# EAGLE board schematic (EAGLE 5.11)
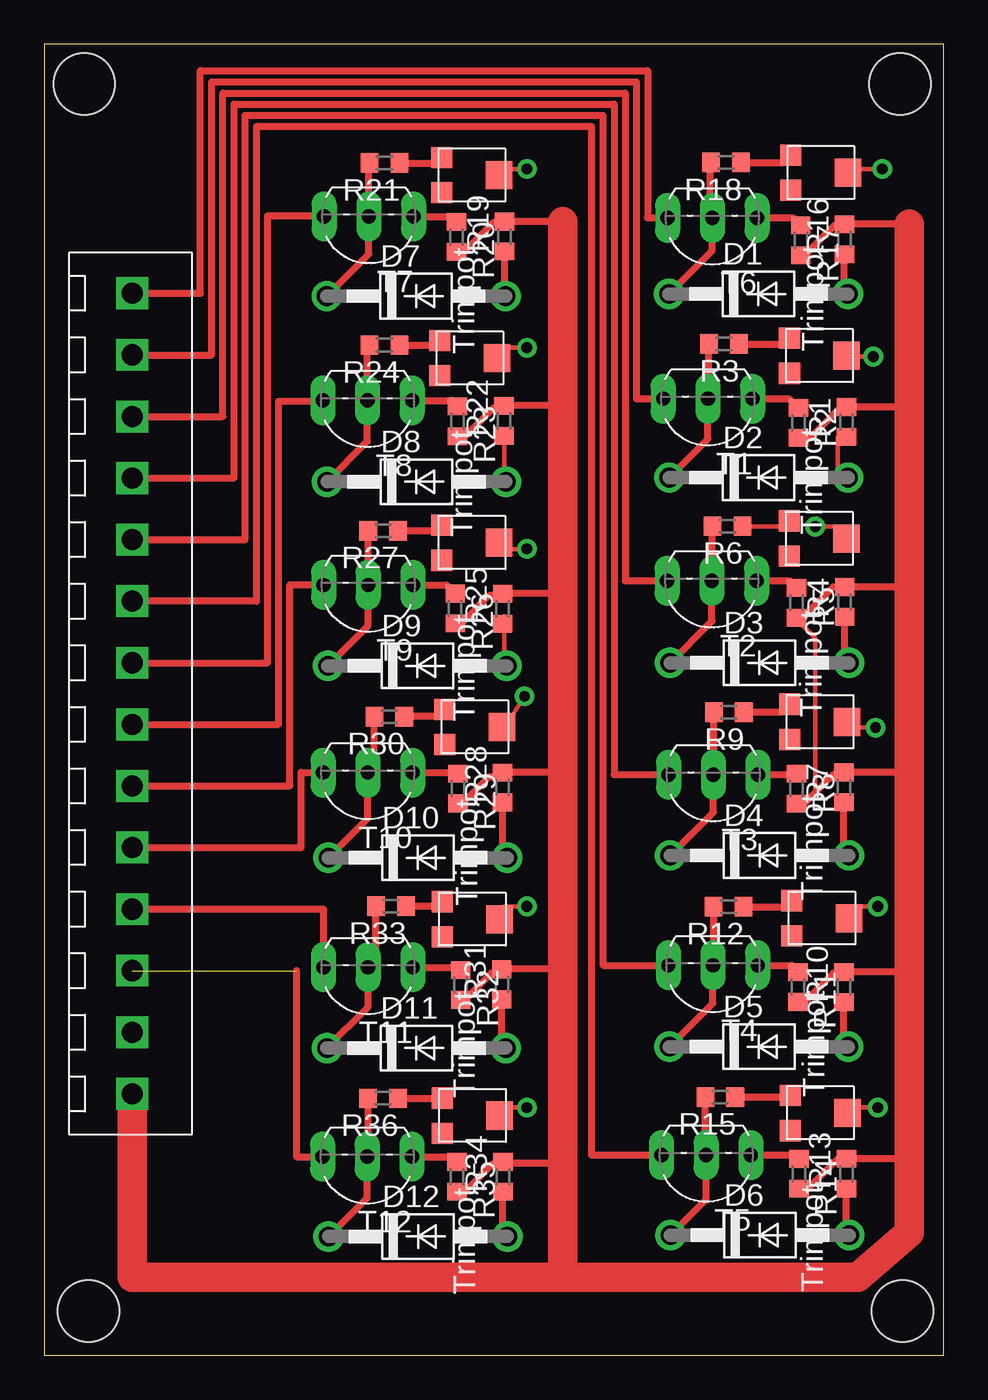
[diagram p0: board, top side]
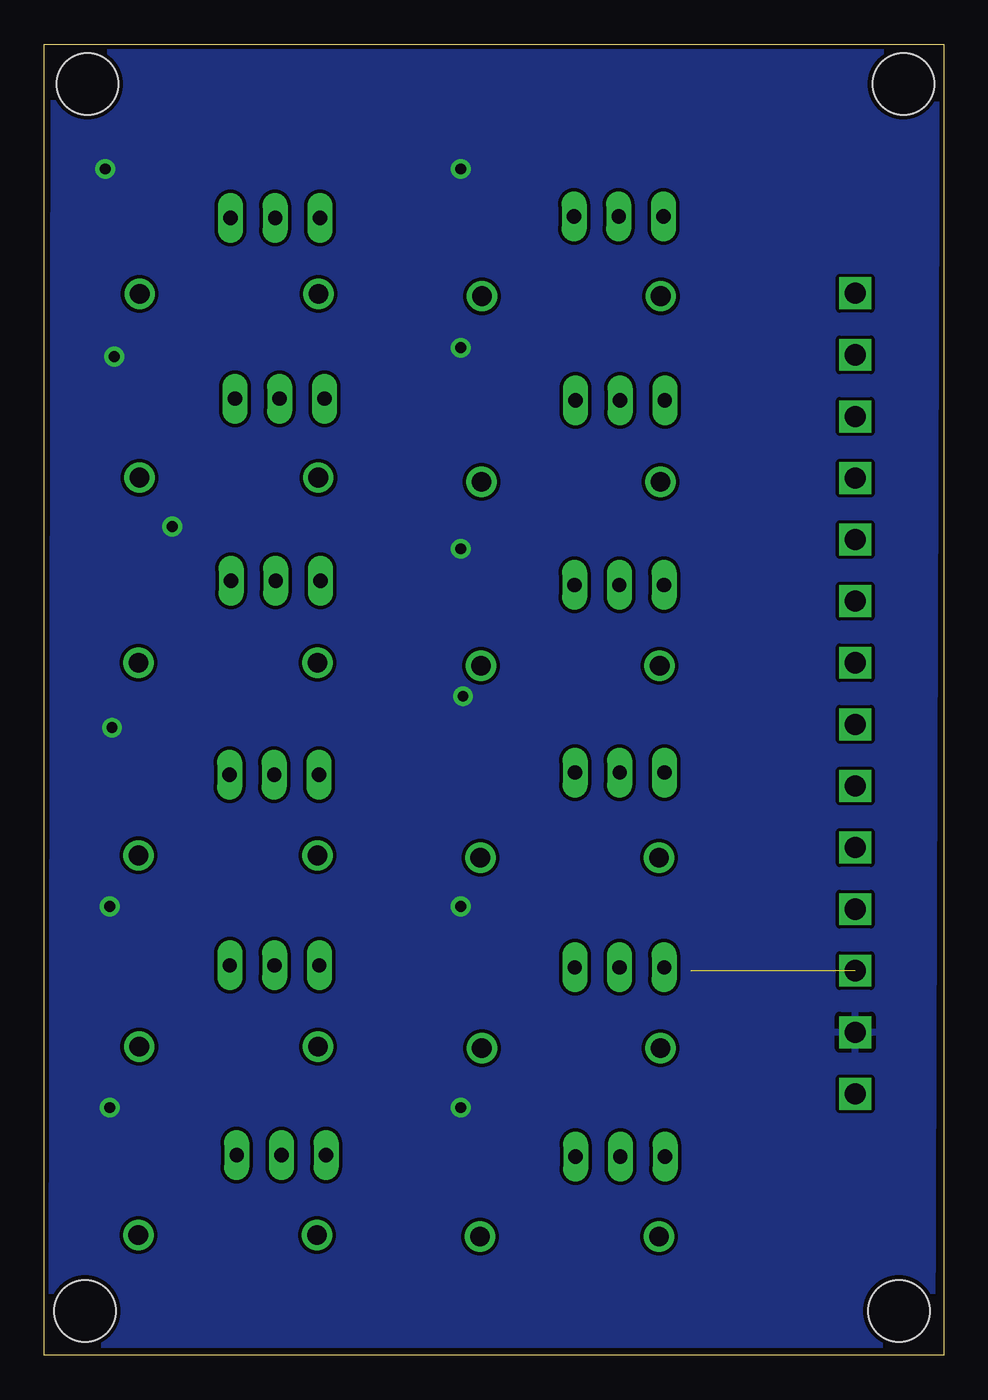
[diagram p1: board, bottom side, seen from below]

Size 51.1 x 74.54 mm. Coordinates in mm from the lower left corner, seen from the top.
Outline: 0,0 51.1,0 51.1,74.54 0,74.54 0,0
Copper layers (1*16): Top 0.035mm / dielectric 1.5mm / Bottom 0.035mm
Design rules "SparkFun": minimum track width 8mil, minimum drill 20mil, track to track 8mil, track to pad 8mil, pad to pad 8mil, via to via 8mil, smd to smd 8mil, copper to edge 10mil, drill to drill 8mil, minimum pad ring 12mil, minimum via ring 10mil, stop-mask expansion 4mil, vias tented up to drill 25mil, thermal gap 10mil
Holes 3.51 mm at 2.29,72.26 48.64,72.26 2.54,2.54 48.77,2.54

## Footprints (pad centres in the part's own frame; a part is rotated, then mirrored left to right if it is on the bottom)
DO41-10 = drill 1.118 round: A 5.08,0; C -5.08,0
R0603 = smd 1 x 1.1: 1 -0.85,0; 2 0.85,0
TO92-EBC = drill 0.813 long: B 0,-1.27; C 2.54,-1.27; E -2.54,-1.27
TC33X-2-102E = smd 1.2 x 1.2: 1 -1,-1.8; 3 1,-1.8 | smd 1.6 x 1.5: 2 0,1.45
OSTTE140161 = drill 1.2 square: 0 -22.75,0; 1 -19.25,0; 2 -15.75,0; 3 -12.25,0; 4 -8.75,0; 5 -5.25,0; 6 -1.75,0; 7 1.75,0; 8 5.25,0; 9 8.75,0; 10 12.25,0; 11 15.75,0; 12 19.25,0; 13 22.75,0

## Placement (x,y rotation side)
D1  1N4004  [DO41-10]  40.59,60.34 0 top
D2  1N4004  [DO41-10]  40.6,49.89 0 top
D3  1N4004  [DO41-10]  40.65,39.37 0 top
D4  1N4004  [DO41-10]  40.65,28.42 0 top
D5  1N4004  [DO41-10]  40.61,17.55 0 top
D6  1N4004  [DO41-10]  40.67,6.84 0 top
D7  1N4004  [DO41-10]  21.14,60.21 0 top
D8  1N4004  [DO41-10]  21.16,49.66 0 top
D9  1N4004  [DO41-10]  21.21,39.2 0 top
D10  1N4004  [DO41-10]  21.24,28.29 0 top
D11  1N4004  [DO41-10]  21.15,17.48 0 top
D12  1N4004  [DO41-10]  21.25,6.76 0 top
R1  [R0603]  45.59,53.05 90 top
R2  [R0603]  42.86,53 270 top
R3  [R0603]  38.63,57.49 180 top
R4  [R0603]  45.49,42.83 90 top
R5  [R0603]  42.75,42.79 270 top
R6  [R0603]  38.83,47.14 180 top
R7  [R0603]  45.44,32.29 90 top
R8  [R0603]  42.76,32.21 270 top
R9  [R0603]  38.91,36.56 180 top
R10  [R0603]  45.45,20.94 90 top
R11  [R0603]  42.83,20.95 270 top
R12  [R0603]  38.89,25.51 180 top
R13  [R0603]  45.59,10.34 90 top
R14  [R0603]  42.89,10.33 270 top
R15  [R0603]  38.42,14.69 180 top
R16  [R0603]  45.48,63.44 90 top
R17  [R0603]  43,63.38 270 top
R18  [R0603]  38.75,67.8 180 top
R19  [R0603]  26.17,63.59 90 top
R20  [R0603]  23.43,63.58 270 top
R21  [R0603]  19.35,67.77 180 top
R22  [R0603]  26.13,53.12 90 top
R23  [R0603]  23.49,53.1 270 top
R24  [R0603]  19.34,57.42 180 top
R25  [R0603]  26.06,42.44 90 top
R26  [R0603]  23.36,42.46 270 top
R27  [R0603]  19.27,46.88 180 top
R28  [R0603]  26.05,32.28 90 top
R29  [R0603]  23.51,32.22 270 top
R30  [R0603]  19.62,36.31 180 top
R31  [R0603]  26.01,21.09 90 top
R32  [R0603]  23.67,21.06 270 top
R33  [R0603]  19.71,25.54 180 top
R34  [R0603]  26.07,10.16 90 top
R35  [R0603]  23.46,10.16 270 top
R36  [R0603]  19.26,14.62 180 top
T1  [TO92-EBC]  37.72,53.11 180 top
T2  [TO92-EBC]  37.94,42.76 180 top
T3  [TO92-EBC]  38.02,31.74 180 top
T4  [TO92-EBC]  38.01,20.9 180 top
T5  [TO92-EBC]  37.62,10.13 180 top
T6  [TO92-EBC]  37.97,63.39 180 top
T7  [TO92-EBC]  18.45,63.46 180 top
T8  [TO92-EBC]  18.38,53.01 180 top
T9  [TO92-EBC]  18.42,42.52 180 top
T10  [TO92-EBC]  18.4,31.86 180 top
T11  [TO92-EBC]  18.41,20.79 180 top
T12  [TO92-EBC]  18.36,10.03 180 top
U$1  TC33X-2-102E  [TC33X-2-102E]  44.23,67.22 270 top
U$2  OSTTE140161  [OSTTE140161]  5.01,37.62 270 top
U$3  TC33X-2-102E  [TC33X-2-102E]  44.15,56.82 270 top
U$4  TC33X-2-102E  [TC33X-2-102E]  44.13,46.44 270 top
U$5  TC33X-2-102E  [TC33X-2-102E]  44.18,36.01 270 top
U$6  TC33X-2-102E  [TC33X-2-102E]  44.29,24.85 270 top
U$7  TC33X-2-102E  [TC33X-2-102E]  44.2,13.79 270 top
U$8  TC33X-2-102E  [TC33X-2-102E]  24.4,67.08 270 top
U$9  TC33X-2-102E  [TC33X-2-102E]  24.28,56.69 270 top
U$10  TC33X-2-102E  [TC33X-2-102E]  24.41,46.2 270 top
U$11  TC33X-2-102E  [TC33X-2-102E]  24.57,35.72 270 top
U$12  TC33X-2-102E  [TC33X-2-102E]  24.43,24.79 270 top
U$13  TC33X-2-102E  [TC33X-2-102E]  24.44,13.63 270 top

## Library data of the parts
D1-D12 = diode
R1-R36 = resistor
T1-T12 = transistor
U$1 U$3-U$13 = rcl1
U$2 = Luke

## Nets
C0: T6.C U$2.0
C1: T1.C U$2.1
C2: T2.C U$2.2
C3: T3.C U$2.3
C4: T4.C U$2.4
C5: T5.C U$2.5
C6: T7.C U$2.6
C7: T8.C U$2.7
C8: T9.C U$2.8
C9: T10.C U$2.9
C10: T11.C U$2.10
C11: T12.C U$2.11
GROUND: U$1.2 U$2.12 U$3.2 U$4.2 U$5.2 U$6.2 U$7.2 U$8.2 U$9.2 U$10.2 U$11.2 U$12.2 U$13.2
N$1: R36.1 U$13.1
N$2: D1.C R18.2 T6.B
N$3: D1.A R16.1
N$4: R2.1 T1.E
N$5: D2.A R1.1
N$6: R33.1 U$12.1
N$7: D2.C R3.2 T1.B
N$8: R5.1 T2.E
N$9: D3.A R4.1
N$10: R30.1 U$11.1
N$11: D3.C R6.2 T2.B
N$12: R8.1 T3.E
N$13: D4.A R7.1
N$14: R27.1 U$10.1
N$15: D4.C R9.2 T3.B
N$16: R11.1 T4.E
N$17: D5.A R10.1
N$18: R24.1 U$9.1
N$19: D5.C R12.2 T4.B
N$20: R14.1 T5.E
N$21: D6.A R13.1
N$22: R21.1 U$8.1
N$23: D6.C R15.2 T5.B
N$24: R20.1 T7.E
N$25: D7.A R19.1
N$26: R17.1 T6.E
N$27: R18.1 U$1.1
N$28: D7.C R21.2 T7.B
N$29: R23.1 T8.E
N$30: D8.A R22.1
N$31: R3.1 U$3.1
N$32: D8.C R24.2 T8.B
N$33: R26.1 T9.E
N$34: D9.A R25.1
N$35: R6.1 U$4.1
N$36: D9.C R27.2 T9.B
N$37: R29.1 T10.E
N$38: D10.A R28.1
N$39: R9.1 U$5.1
N$40: D10.C R30.2 T10.B
N$41: R32.1 T11.E
N$42: D11.A R31.1
N$43: R12.1 U$6.1
N$44: D11.C R33.2 T11.B
N$45: R35.1 T12.E
N$46: D12.A R34.1
N$47: R15.1 U$7.1
N$48: D12.C R36.2 T12.B
VOLTAGE: R1.2 R2.2 R4.2 R5.2 R7.2 R8.2 R10.2 R11.2 R13.2 R14.2 R16.2 R17.2 R19.2 R20.2 R22.2 R23.2 R25.2 R26.2 R28.2 R29.2 R31.2 R32.2 R34.2 R35.2 U$2.13

## Tracks (layer width: path | path; a pad name or v marks a point on that pad's centre or on a via)
C0
  Top 0.406: U$2.0 8.89,60.37 8.89,73.03 34.29,73.03 34.29,64.66 T6.C
C1
  Top 0.406: U$2.1 9.53,56.87 9.53,72.39 33.66,72.39 33.66,54.38 T1.C
C2
  Top 0.406: U$2.2 10.16,53.37 10.16,71.75 33.02,71.75 33.02,44.03 T2.C
C3
  Top 0.406: U$2.3 10.79,49.87 10.79,71.12 32.38,71.12 32.38,33.01 T3.C
C4
  Top 0.406: U$2.4 11.43,46.37 11.43,70.48 31.75,70.48 31.75,22.17 T4.C
C5
  Top 0.406: U$2.5 12.06,42.87 12.06,69.85 31.11,69.85 31.11,11.4 T5.C
C6
  Top 0.406: U$2.6 12.7,39.37 12.7,64.77 15.91,64.77 T7.C
C7
  Top 0.406: U$2.7 13.34,35.87 13.34,54.23 15.84,54.23 T8.C
C8
  Top 0.406: U$2.8 13.97,32.37 13.97,43.81 15.88,43.81 T9.C
C9
  Top 0.406: U$2.9 14.61,28.87 14.61,33.15 15.86,33.15 T10.C
C10
  Top 0.406: U$2.10 15.87,25.37 T11.C
C11  (1 unrouted)
  Top 0.406: 14.35,21.87 14.35,11.3 T12.C
GROUND  (via drill 0.61)
  Top 0.254: v27.43,14.1 26.16,14.1 U$13.2 | v47.37,14.1 46.35,14.1 U$7.2 | v27.43,25.53 26.16,25.53 U$12.2 | v47.37,25.53 46.35,25.53 U$6.2 | v27.3,37.47 26.16,35.69 U$11.2 | v47.24,35.69 46.35,35.69 U$5.2 | v27.43,45.85 26.16,45.85 U$10.2 | v43.81,47.12 45.09,47.12 U$4.2 | v27.43,57.28 26.16,57.28 U$9.2 | v27.43,67.44 26.16,67.44 U$8.2 | v47.12,56.77 45.85,56.77 U$3.2 | v47.62,67.44 46.35,67.44 U$1.2
  pour Bottom: 0.38,74.17 50.55,74.17 50.67,0.64 0.64,0.64
N$1
  Top 0.406: R36.1 22.75,14.62 U$13.1
N$2
  Top 0.406: 37.95,64.66 T6.B | 37.95,64.66 37.85,64.77 37.85,67.74 R18.2 | 37.95,64.66 37.95,62.78 D1.C
N$3
  Top 0.406: R16.1 45.48,61.07 45.72,60.83 45.72,60.39 D1.A
N$4
  Top 0.406: T1.E 42.33,54.38 R2.1
N$5
  Top 0.254: R1.1 45.09,52.2 45.09,49.66 D2.A
N$6
  Top 0.406: R33.1 22.75,25.54 U$12.1
N$7
  Top 0.406: R3.2 37.78,54.44 T1.B 37.72,52.09 D2.C
N$8
  Top 0.406: T2.E 42.36,44.03 R5.1
N$9
  Top 0.406: R4.1 45.49,39.6 D3.A
N$10
  Top 0.406: R30.1 22.61,36.31 U$11.1
N$11
  Top 0.406: R6.2 37.98,44.07 T2.B 37.94,41.74 D3.C
N$12
  Top 0.406: T3.E 42.71,33.01 R8.1
N$13
  Top 0.406: R7.1 45.44,28.71 D4.A
N$14
  Top 0.406: R27.1 22.55,46.88 U$10.1
N$15
  Top 0.406: R9.2 38.06,33.05 T3.B 38.02,30.88 D4.C
N$16
  Top 0.406: T4.E 42.45,22.17 R11.1
N$17
  Top 0.406: R10.1 45.45,17.8 D5.A
N$18
  Top 0.406: R24.1 22.72,57.42 U$9.1
N$19
  Top 0.406: R12.2 38.04,22.2 T4.B 38.01,20.02 D5.C
N$20
  Top 0.406: T5.E 42.67,11.4 R14.1
N$21
  Top 0.406: R13.1 45.59,7 D6.A
N$22
  Top 0.406: R21.1 22.67,67.77 U$8.1
N$23
  Top 0.406: R15.2 37.57,11.44 T5.B 37.62,8.87 D6.C
N$24
  Top 0.406: T7.E 23.12,64.73 R20.1
N$25
  Top 0.406: R19.1 26.17,60.26 D7.A
N$26
  Top 0.406: T6.E 42.56,64.66 R17.1
N$27
  Top 0.406: R18.1 42,67.8 U$1.1
N$28
  Top 0.406: R21.2 18.45,67.73 T7.B 18.45,62.6 D7.C
N$29
  Top 0.406: T8.E 23.16,54.28 R23.1
N$30
  Top 0.254: R22.1 26.16,52.2 26.16,49.66 D8.A
N$31
  Top 0.406: R3.1 42.02,57.49 U$3.1
N$32
  Top 0.406: R24.2 18.38,57.31 T8.B 18.38,51.96 D8.C
N$33
  Top 0.406: T9.E 22.88,43.79 R26.1
N$34
  Top 0.254: R25.1 26.16,42.04 26.16,39.5 D9.A
N$35
  Top 0.254: R6.1 40.01,47.12 42.55,47.12 U$4.1
N$36
  Top 0.406: R27.2 18.42,43.92 T9.B 18.42,41.49 D9.C
N$37
  Top 0.406: T10.E 23.45,33.13 R29.1
N$38
  Top 0.406: R28.1 26.05,28.55 D10.A
N$39
  Top 0.406: R9.1 41.92,36.56 U$5.1
N$40
  Top 0.406: D10.C 18.4,30.53 T10.B 18.77,33.51 R30.2
N$41
  Top 0.406: T11.E 23.52,22.06 R32.1
N$42
  Top 0.406: R31.1 26.01,17.7 D11.A
N$43
  Top 0.406: R12.1 42.14,25.51 U$6.1
N$44
  Top 0.406: R33.2 18.86,22.51 T11.B 18.41,19.82 D11.C
N$45
  Top 0.406: T12.E 23.17,11.3 R35.1
N$46
  Top 0.406: R34.1 26.07,7.02 D12.A
N$47
  Top 0.406: R15.1 42.3,14.69 U$7.1
N$48
  Top 0.406: R36.2 18.41,11.34 T12.B 18.36,8.96 D12.C
VOLTAGE
  Top 0.254: R5.2 42.55,42.04 43.81,40.77 43.81,31.88 43.75,31.94
  Top 0.406: 29.46,64.44 R19.2 26.11,64.39 25.53,64.39 23.87,62.73 R20.2 | 29.46,53.98 R22.2 26.01,53.85 25.53,53.85 23.93,52.25 R23.2 | 29.46,43.31 26.06,43.31 R25.2 25.95,43.18 25.27,43.18 23.7,41.61 R26.2 | 29.46,33.15 26.05,33.15 R28.2 25.82,32.89 25.27,32.89 23.75,31.37 R29.2 | 29.46,21.97 26.01,21.97 R31.2 25.78,21.72 25.4,21.72 23.89,20.21 R32.2 | 29.46,10.92 26.07,10.92 R34.2 25.99,10.92 25.53,10.92 23.91,9.31 R35.2 | 49.15,11.19 R13.2 45.58,11.18 45.09,11.18 43.39,9.48 R14.2 | 49.15,64.29 R16.2 45.45,64.26 44.96,64.26 43.23,62.53 R17.2 | 49.15,21.79 R10.2 45.37,21.72 44.83,21.72 43.21,20.1 R11.2 | 49.15,33.14 R7.2 45.33,33.02 44.83,33.02 43.75,31.94 43.17,31.36 R8.2 | 49.15,43.67 R4.2 | 49.15,53.9 R1.2 45.41,53.72 45.09,53.72 43.52,52.15 R2.2 | R5.2 43.08,41.94 44.83,43.69
  Top 1.676: U$2.13 5.01,4.45 29.46,4.45 | 29.46,4.45 29.46,10.92 29.46,21.97 29.46,33.15 29.46,43.31 29.46,53.98 29.46,64.44 | 49.15,64.29 49.15,53.9 49.15,43.67 49.15,33.14 49.15,21.79 49.15,11.19 49.15,6.99 46.23,4.45 29.46,4.45